# Altium PCB CurrentSensor.PcbDoc
Units mm, origin at the board's own origin, x right, y up, seen from the top; angles counter-clockwise.
Board outline 60 x 60 mm, 2 copper layers (Top Layer, Bottom Layer); 77 components, 38 nets, 222 pads, 436 vias.
Unrouted connection lines stored in the file: 1.
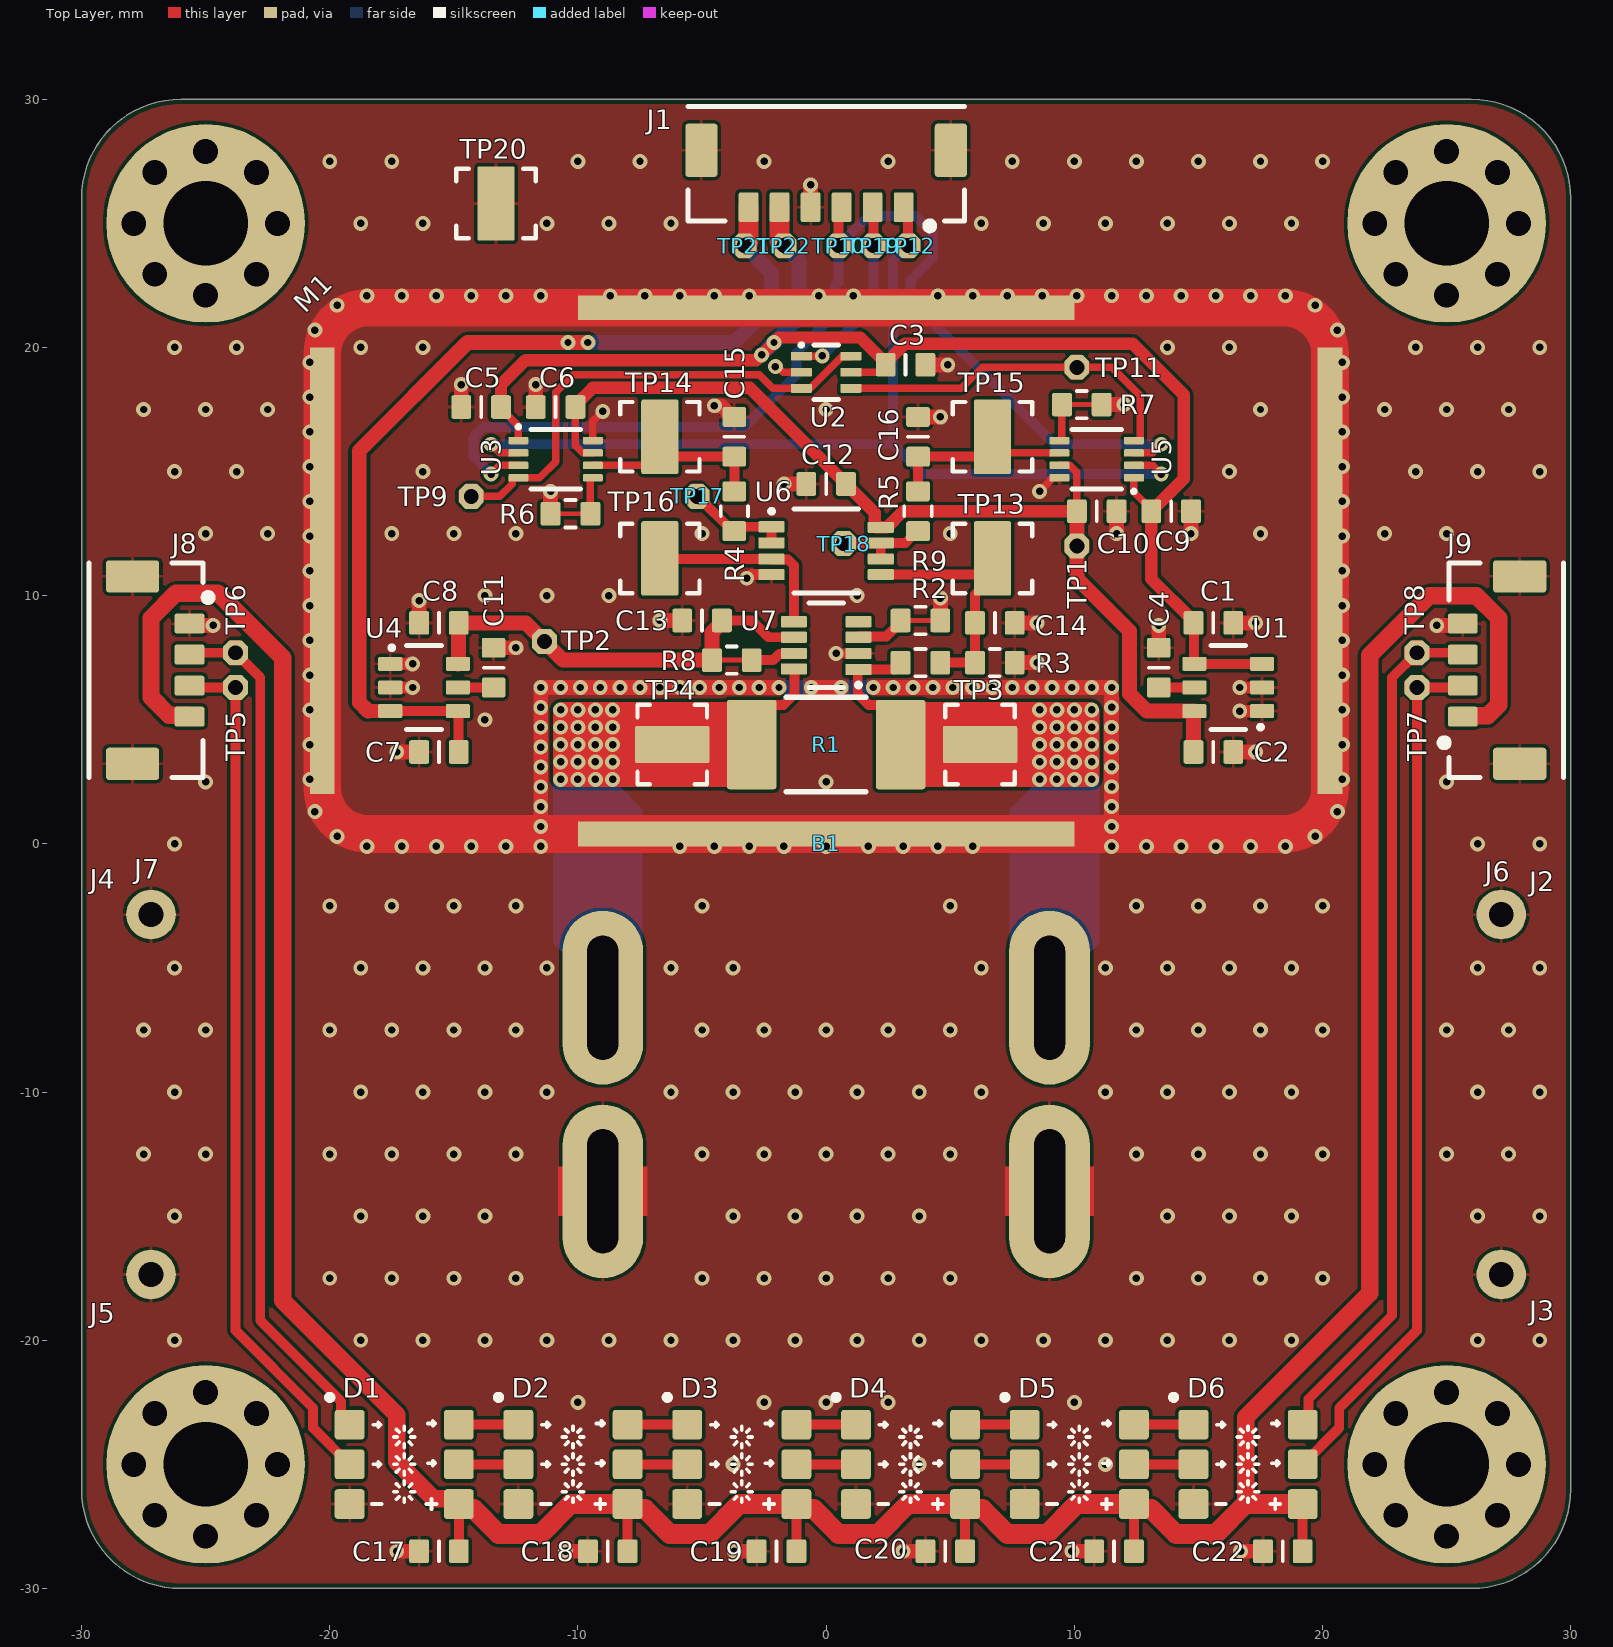
[diagram p0: Top Layer view]
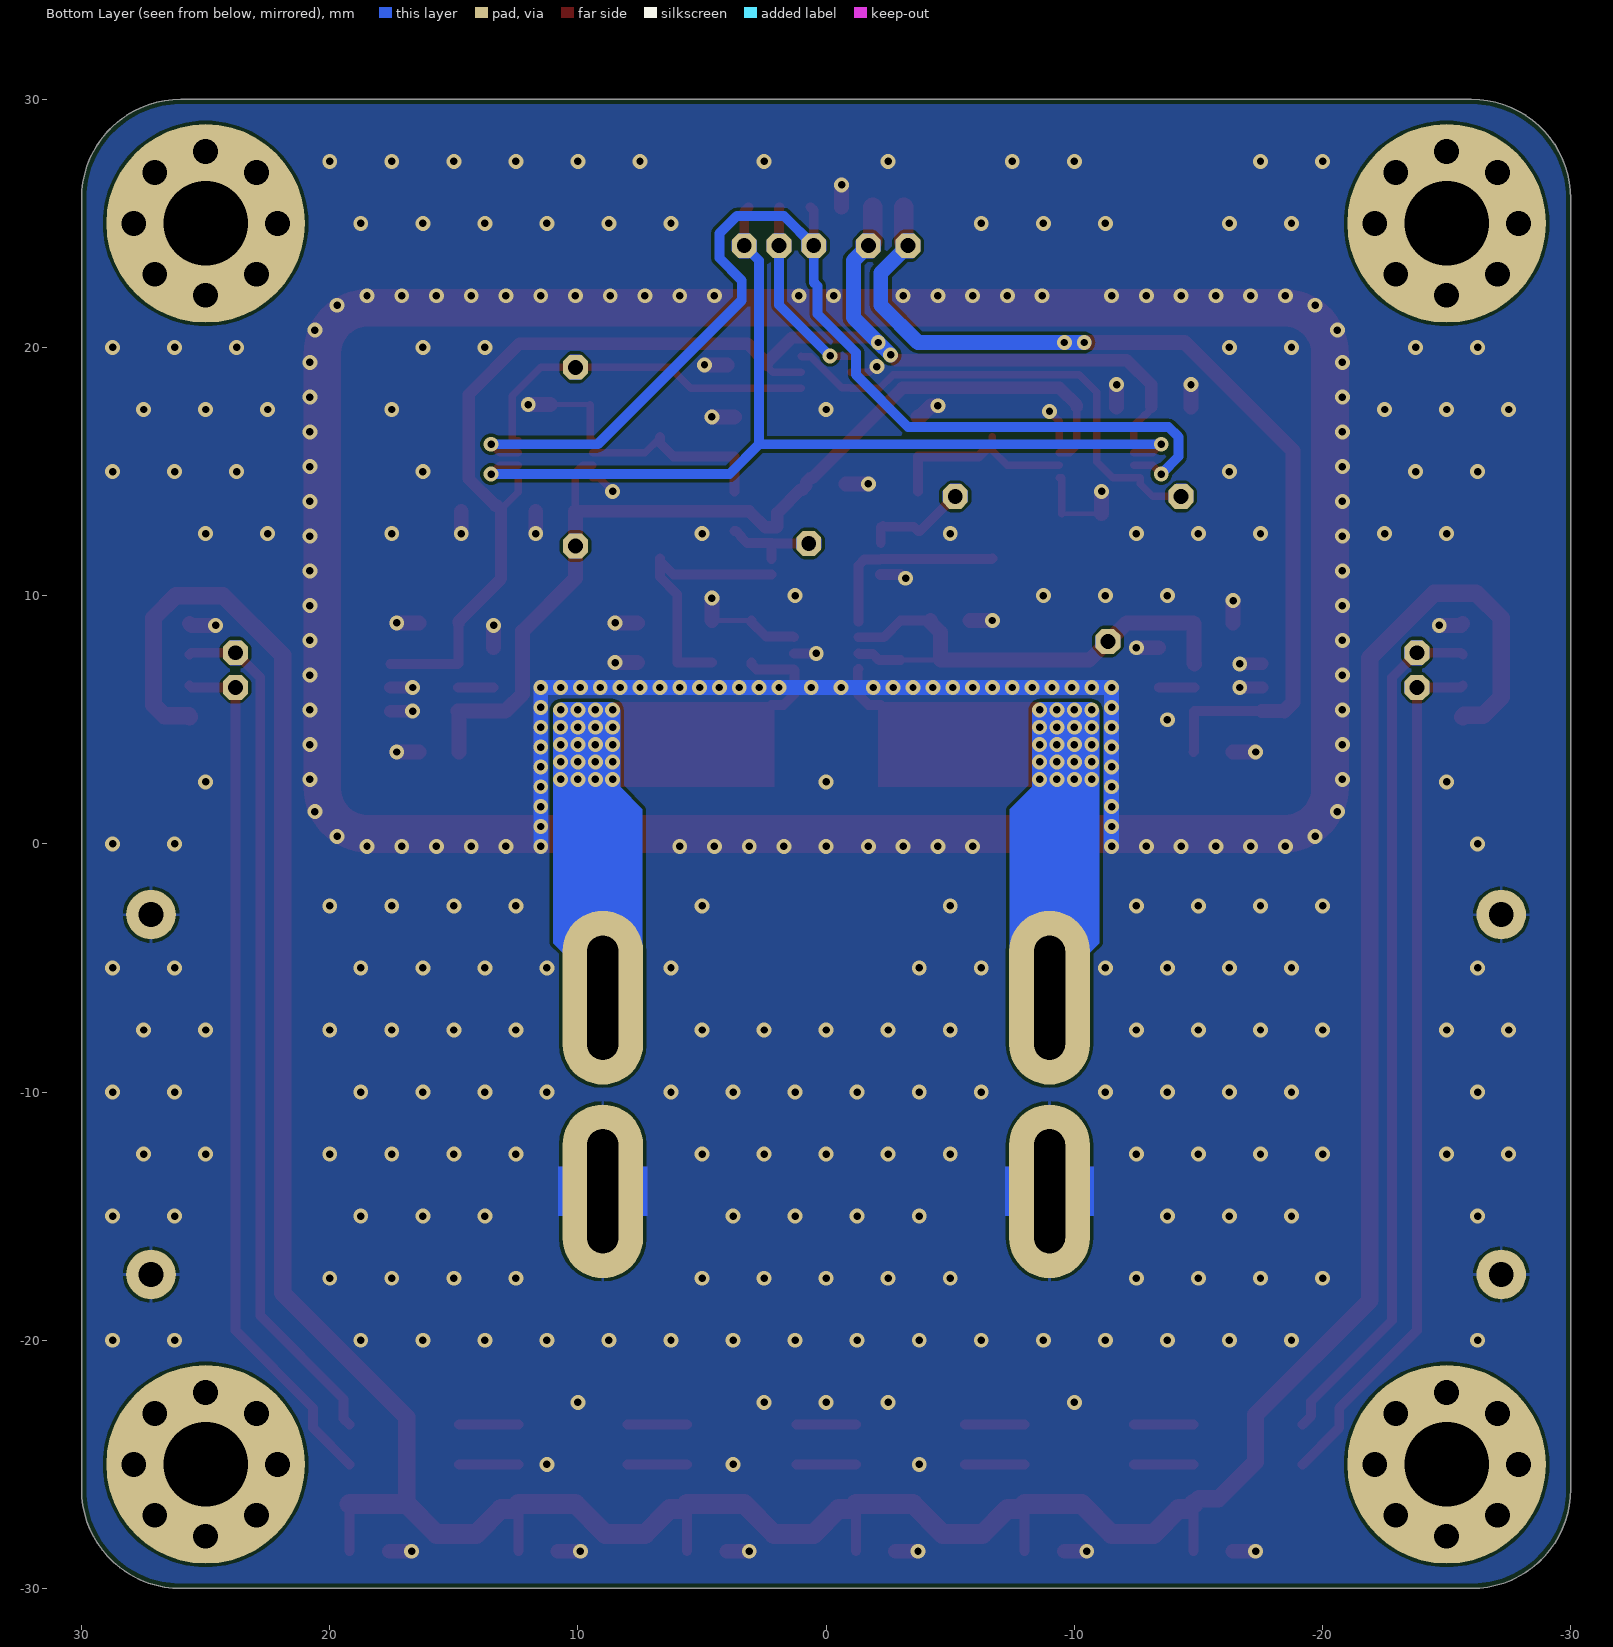
[diagram p1: Bottom Layer view, seen from below]
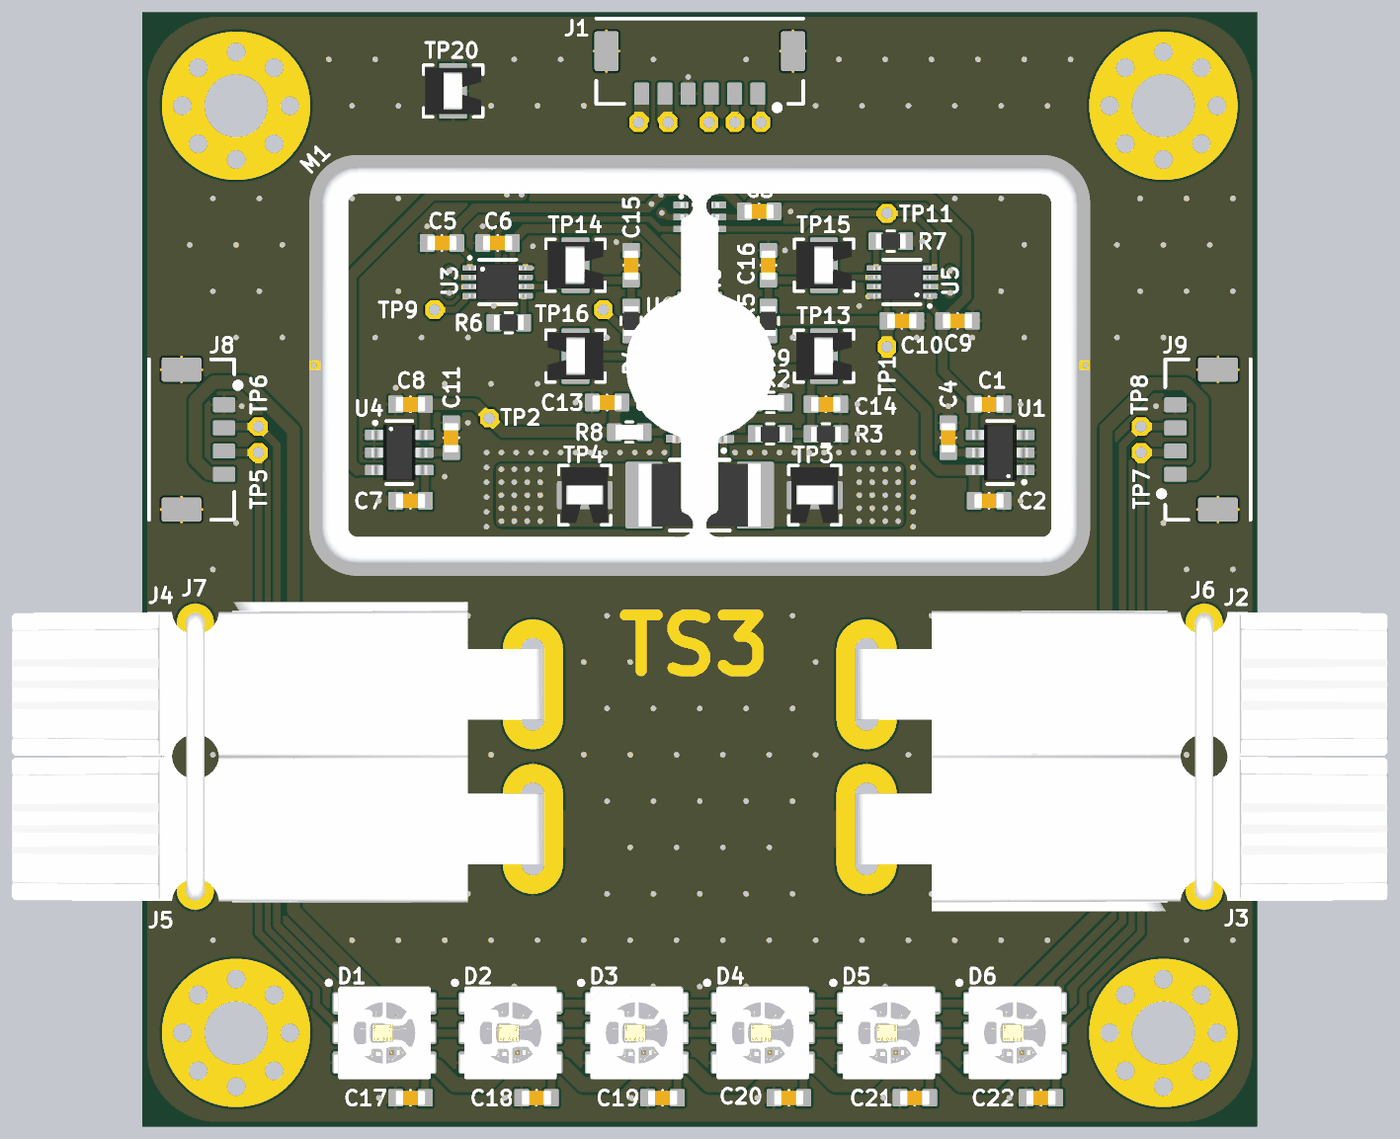
[diagram p2: 3D render of the assembled board from above, using the file's embedded part models]

## Layer stack, top to bottom
Top Solder: solder mask 0.0102, Solder Resist, Dk 3.5
Top Layer: signal copper 0.0356
Dielectric 1: dielectric 0.32, FR-4, Dk 4.8
Bottom Layer: signal copper 0.0356
Bottom Solder: solder mask 0.0102, Solder Resist, Dk 3.5

## Board outline
-26,-30 cw(c-26,-26) -30,-26 -30,26 cw(c-26,26) -26,30 26,30 cw(c26,26) 30,26 30,-26 cw(c26,-26) 26,-30

## Design rules (kind name [scope] priority, off if disabled: settings)
BoardOutlineClearance [All] p1: gap=0.2 ignorepadtopadclearanceinfootprint=FALSE
Clearance [All] p1: gap=0.127 ignorepadtopadclearanceinfootprint=FALSE except(0.25: Arc-Hole Track-Hole SMDPad-Hole THPad-Hole Via-Hole Fill-Hole Poly-Hole Region-Hole Text-Hole)
ComponentClearance [NOT InComponent('B1') vs NOT InComponent('B1')] p1: gap=0.127 collisioncheckmode=3 verticalgap=0.127 showdistances=TRUE
DiffPairsRouting [All] p1: maxlimit=0.254 minlimit=0.127 mostfreqgap=0.127 toplayer_minwidth=0.127 toplayer_maxwidth=25.4 toplayer_prefwidth=0.127 bottomlayer_minwidth=0.127 bottomlayer_maxwidth=25.4 bottomlayer_prefwidth=0.127 maxuncoupledlength=12.7
DiffPairsRouting DiffPairsRouting_USB [InDifferentialPair('USBD')] p2: maxlimit=0.2 minlimit=0.2 mostfreqgap=0.2 toplayer_minwidth=0.766 toplayer_maxwidth=0.766 toplayer_prefwidth=0.766 bottomlayer_minwidth=0.766 bottomlayer_maxwidth=0.766 bottomlayer_prefwidth=0.766 impedanceprofiledriven=TRUE impedanceprofileid={7DB69605-737D-4C2B-A8A7-E868D9FD1BFF} maxuncoupledlength=12.7
Height [All] p1: minheight=0 maxheight=1816.048 prefheight=12.7
HoleSize [All] p1: absolutevalues=TRUE maxlimit=6.3 minlimit=0.3 maxpercent=80.000 minpercent=20.000
HoleToHoleClearance [All] p1: gap=0.25 allowstackedmicrovias=FALSE
MinimumAnnularRing [All] p1: minimumring=0.15
MinimumSolderMaskSliver [All] p1: minsoldermaskwidth=0
PlaneClearance [All] p1: clearance=0.127
PlaneConnect PlaneConnectPowerPads [InPadClass('PowerPads')] p1: planeconnectstyle=Direct reliefexpansion=0.508 reliefentries=4 reliefconductorwidth=0.254 reliefairgap=0.254
PlaneConnect [All] p2: pad.planeconnectstyle=Relief pad.reliefexpansion=0.3 pad.reliefentries=4 pad.reliefconductorwidth=0.127 pad.reliefairgap=0.127 via.planeconnectstyle=Direct via.reliefexpansion=0.3 via.reliefentries=4 via.reliefconductorwidth=0.127 via.reliefairgap=0.127
PolygonConnect PolygonConnectPowerPads [All vs (InPadClass('PowerPads'))] p1: connectstyle=Direct reliefconductorwidth=0.254 reliefentries=4 polygonreliefangle="90 Angle" airgapwidth=0.254
PolygonConnect [All] p2: thpad.connectstyle=Relief thpad.reliefconductorwidth=0.127 thpad.reliefentries=4 thpad.polygonreliefangle="90 Angle" thpad.airgapwidth=0.127 smdpad.connectstyle=Relief smdpad.reliefconductorwidth=0.127 smdpad.reliefentries=4 smdpad.polygonreliefangle="90 Angle" smdpad.airgapwidth=0.127 via.connectstyle=Direct via.reliefconductorwidth=0.127 via.reliefentries=4 via.polygonreliefangle="90 Angle" via.airgapwidth=0.127
RoutingVias [All] p1: holewidth=0.3 width=0.5 viastyle="Through Hole" minholewidth=0.3 minwidth=0.5 maxholewidth=0.6 maxwidth=6.6
SilkToSilkClearance [All] p1: silktosilkclearance=0
SilkToSolderMaskClearance [IsPad] p1: minsilkscreentomaskgap=0.127 clearancetoexposedcopper=TRUE
SolderMaskExpansion SolderMaskExpansion_Via [IsVia] p1: expansion=0.075 istentingtop=TRUE
SolderMaskExpansion [NOT IsVia] p2: expansion=0.075 istentingtop=FALSE
Width [All] p1: maxlimit=25.4 minlimit=0.127 preferedwidth=0.127 minimp=50.000000 maximp=50.000000 favimp=50.000000
20 further rules are at their usual default settings.

## Components (designator, comment, footprint, x,y, rotation, side; value= is the part's Value field where it differs from the comment)
B1 "Board Outline Square" PCB_OUTLINE_SQUARE 0,0 r0 top locked
C1 "Capacitor - Ceramic - Generic" CAPACITOR_0603(1608)_GENERIC 15.6,8.9 r0 top value=100nF
C2 "Capacitor - Ceramic - Generic" CAPACITOR_0603(1608)_GENERIC 15.6,3.7 r180 top value=1uF
C3 "Capacitor - Ceramic - Generic" CAPACITOR_0603(1608)_GENERIC 3.2,19.3 r0 top value=100nF
C4 "Capacitor - Ceramic - Generic" CAPACITOR_0603(1608)_GENERIC 13.4,7.1 r270 top value=1uF
C5 "Capacitor - Ceramic - Generic" CAPACITOR_0603(1608)_GENERIC -13.9,17.6 r0 top value=1uF
C6 "Capacitor - Ceramic - Generic" CAPACITOR_0603(1608)_GENERIC -10.9,17.6 r0 top value=1uF
C7 "Capacitor - Ceramic - Generic" CAPACITOR_0603(1608)_GENERIC -15.6,3.7 r180 top value=100nF
C8 "Capacitor - Ceramic - Generic" CAPACITOR_0603(1608)_GENERIC -15.6,8.9 r0 top value=1uF
C9 "Capacitor - Ceramic - Generic" CAPACITOR_0603(1608)_GENERIC 13.9,13.4 r180 top value=1uF
C10 "Capacitor - Ceramic - Generic" CAPACITOR_0603(1608)_GENERIC 10.9,13.4 r180 top value=1uF
C11 "Capacitor - Ceramic - Generic" CAPACITOR_0603(1608)_GENERIC -13.4,7.1 r270 top value=1uF
C12 "Capacitor - Ceramic - Generic" CAPACITOR_0603(1608)_GENERIC 0,14.5 r180 top value=100nF
C13 "Capacitor - Ceramic - Generic" CAPACITOR_0603(1608)_GENERIC -5,9 r180 top value=100nF
C14 "Capacitor - Ceramic - Generic" CAPACITOR_0603(1608)_GENERIC 6.8,8.9 r0 top value=39nF
C15 "Capacitor - Ceramic - Generic" CAPACITOR_0603(1608)_GENERIC -3.7,16.4 r90 top value=10nF
C16 "Capacitor - Ceramic - Generic" CAPACITOR_0603(1608)_GENERIC 3.7,16.4 r90 top value=10nF
C17 "Capacitor - Ceramic - Generic" CAPACITOR_0603(1608)_GENERIC -15.6,-28.5 r180 top value=100nF
C18 "Capacitor - Ceramic - Generic" CAPACITOR_0603(1608)_GENERIC -8.8,-28.5 r180 top value=100nF
C19 "Capacitor - Ceramic - Generic" CAPACITOR_0603(1608)_GENERIC -2,-28.5 r180 top value=100nF
C20 "Capacitor - Ceramic - Generic" CAPACITOR_0603(1608)_GENERIC 4.8,-28.5 r180 top value=100nF
C21 "Capacitor - Ceramic - Generic" CAPACITOR_0603(1608)_GENERIC 11.6,-28.5 r180 top value=100nF
C22 "Capacitor - Ceramic - Generic" CAPACITOR_0603(1608)_GENERIC 18.4,-28.5 r180 top value=100nF
D1 "APA102C" 5X5MM(6PIN)_JLEAD_GENERIC -17,-25 r0 top
D2 "APA102C" 5X5MM(6PIN)_JLEAD_GENERIC -10.2,-25 r0 top
D3 "APA102C" 5X5MM(6PIN)_JLEAD_GENERIC -3.4,-25 r0 top
D4 "APA102C" 5X5MM(6PIN)_JLEAD_GENERIC 3.4,-25 r0 top
D5 "APA102C" 5X5MM(6PIN)_JLEAD_GENERIC 10.2,-25 r0 top
D6 "APA102C" 5X5MM(6PIN)_JLEAD_GENERIC 17,-25 r0 top
J1 "Connector - Header - 6P 2M - Generic" CONNECTOR_HEADER_MOLEX_5055670681 0,27.4 r0 top
J2 "PP45" CONNECTOR_BTOC_PP45_ANDERSON 9,-6.2 r90 top
J3 "PP45" CONNECTOR_BTOC_PP45_ANDERSON 9,-14 r90 top
J4 "PP45" CONNECTOR_BTOC_PP45_ANDERSON -9,-6.2 r270 top
J5 "PP45" CONNECTOR_BTOC_PP45_ANDERSON -9,-14 r270 top
J6 "PP45 Staple" CONNECTOR_ACCESSORY_PP45-STAPLE_ANDERSON 27.2,-10.1 r90 top
J7 "PP45 Staple" CONNECTOR_ACCESSORY_PP45-STAPLE_ANDERSON -27.2,-10.1 r270 top
J8 "Connector - Header - 4P 2M - Generic" CONNECTOR_HEADER_MOLEX_5055670481 -27.4,7 r90 top
J9 "Connector - Header - 4P 2M - Generic" CONNECTOR_HEADER_MOLEX_5055670481 27.4,7 r270 top
M1 "3670409" RFSHIELD_WURTH_3670409 0,11 r0 top locked
R1 "Resistor - Fixed - Generic" RESISTOR_2512(6432)_GENERIC 0,4 r0 top locked value=6mR
R2 "Resistor - Fixed - Generic" RESISTOR_0603(1608)_GENERIC 3.8,7.3 r0 top value=120kR
R3 "Resistor - Fixed - Generic" RESISTOR_0603(1608)_GENERIC 6.8,7.3 r0 top value=10kR
R4 "Resistor - Fixed - Generic" RESISTOR_0603(1608)_GENERIC -3.7,13.4 r90 top value=10R
R5 "Resistor - Fixed - Generic" RESISTOR_0603(1608)_GENERIC 3.7,13.4 r90 top value=10R
R6 "Resistor - Fixed - Jumper" RESISTOR_0603(1608)_NC_JUMPER -10.3,13.3 r0 top net-tie value=0R
R7 "Resistor - Fixed - Jumper" RESISTOR_0603(1608)_NC_JUMPER 10.3,17.7 r180 top net-tie value=0R
R8 "Resistor - Fixed - Jumper" RESISTOR_0603(1608)_NC_JUMPER -3.8,7.4 r0 top net-tie value=0R
R9 "Resistor - Fixed - Jumper" RESISTOR_0603(1608)_NC_JUMPER 3.8,9 r180 top net-tie value=0R
TP1 "Test Point - THT" TESTPOINT_THT_OCTAGON 10.1,12 r90 top
TP2 "Test Point - THT" TESTPOINT_THT_OCTAGON -11.35,8.15 r90 top
TP3 "519XTR" TESTPOINT_LOOP_SMD_KEYSTONE_519X 6.2,4 r0 top
TP4 "519XTR" TESTPOINT_LOOP_SMD_KEYSTONE_519X -6.2,4 r0 top
TP5 "Test Point - THT" TESTPOINT_THT_OCTAGON -23.8,6.3 r90 top
TP6 "Test Point - THT" TESTPOINT_THT_OCTAGON -23.8,7.7 r90 top
TP7 "Test Point - THT" TESTPOINT_THT_OCTAGON 23.8,6.3 r90 top
TP8 "Test Point - THT" TESTPOINT_THT_OCTAGON 23.8,7.7 r90 top
TP9 "Test Point - THT" TESTPOINT_THT_OCTAGON -14.3,14 r90 top
TP10 "Test Point - THT" TESTPOINT_THT_OCTAGON 0.5,24.1 r90 top
TP11 "Test Point - THT" TESTPOINT_THT_OCTAGON 10.1,19.2 r90 top
TP12 "Test Point - THT" TESTPOINT_THT_OCTAGON 3.3,24.1 r90 top
TP13 "519XTR" TESTPOINT_LOOP_SMD_KEYSTONE_519X 6.7,11.5 r90 top
TP14 "519XTR" TESTPOINT_LOOP_SMD_KEYSTONE_519X -6.7,16.4 r90 top
TP15 "519XTR" TESTPOINT_LOOP_SMD_KEYSTONE_519X 6.7,16.4 r90 top
TP16 "519XTR" TESTPOINT_LOOP_SMD_KEYSTONE_519X -6.7,11.5 r270 top
TP17 "Test Point - THT" TESTPOINT_THT_OCTAGON -5.2,14 r90 top
TP18 "Test Point - THT" TESTPOINT_THT_OCTAGON 0.7,12.1 r90 top
TP19 "Test Point - THT" TESTPOINT_THT_OCTAGON 1.9,24.1 r90 top
TP20 "519XTR" TESTPOINT_LOOP_SMD_KEYSTONE_519X -13.3,25.8 r90 top
TP21 "Test Point - THT" TESTPOINT_THT_OCTAGON -3.3,24.1 r90 top
TP22 "Test Point - THT" TESTPOINT_THT_OCTAGON -1.7,24.1 r90 top
U1 "REF35205QDBV" SOT23-6(DBV0006A)_TI 16.2,6.3 r180 top
U2 "SN74AUP2G14" SC70-6(DCK0006A)_TI 0,19 r0 top
U3 "ADS7042ID" VSSOP-8(DCU0008A)_TI -10.9,15.5 r0 top
U4 "REF35409QDBV" SOT23-6(DBV0006A)_TI -16.2,6.3 r0 top
U5 "ADS7042ID" VSSOP-8(DCU0008A)_TI 10.9,15.5 r180 top
U6 "TLV9002QDGK" VSSOP-8(DGK0008A)_TI 0,11.8 r0 top
U7 "INA241A5" SOT23-8(DDF0008A)_TI 0,8 r180 top

## Footprints (in the part's own frame and the unit in brackets; to place one, negate y for a bottom-side part, rotate by r counter-clockwise, add the part's x,y. Pads: shape width x height; smd on the part's side, far side on the other; paste and mask are expansions set on the pad)
5X5MM(6PIN)_JLEAD_GENERIC [mm]
  rrect20% 1.2x1.2 smd: 1(-2.2,1.6) 2(-2.2,0) 3(-2.2,-1.6) 4(2.2,-1.6) 5(2.2,0) 6(2.2,1.6)
  silkscreen extent -3.1,-1.8 1.3,2.8, body extent -2.75,-2.5 2.75,2.5, height 1.55
CAPACITOR_0603(1608)_GENERIC [mm]
  rrect20% 0.8x0.95 smd: 1(-0.8,0) 2(0.8,0)
  silkscreen extent 0,-0.4 0,0.4, body extent -0.8,-0.4 0.8,0.4, height 0.9
CONNECTOR_ACCESSORY_PP45-STAPLE_ANDERSON [mm]
  round 2 hole 1: 1(-7.25,0) 1(7.25,0)
  oval 7x3.25 on Mech16: ""(-4,18.2) ""(3.9,18.2)
  body extent -7.75,-0.5 7.75,0.5, height 9.4
CONNECTOR_BTOC_PP45_ANDERSON [mm]
  oval 7x3.25 hole 1.25 slot 5 at 0 deg: 1(0,0)
  oval 7x3.25 on Mech16: ""(-7.9,0) ""(0,7.92) ""(7.9,0)
  body extent -4.45,-28.1 3.96,0.52, height 8.39
CONNECTOR_HEADER_MOLEX_5055670481 [mm]
  rrect20% 0.8x1.2 smd: 1(1.875,-1.75) 2(0.625,-1.75) 3(-0.625,-1.75) 4(-1.875,-1.75)
  rrect20% 1.3x2.15 smd mask+0.076: M1(3.775,0.545) M2(-3.775,0.545)
  silkscreen extent -4.33,-2.65 4.33,2.3
CONNECTOR_HEADER_MOLEX_5055670681 [mm]
  rrect20% 0.8x1.2 smd: 1(3.125,-1.75) 2(1.875,-1.75) 3(0.625,-1.75) 4(-0.625,-1.75) 5(-1.875,-1.75) 6(-3.125,-1.75)
  rrect20% 1.3x2.15 smd mask+0.076: M1(5.025,0.545) M2(-5.025,0.545)
  silkscreen extent -5.58,-2.65 5.58,2.3
PCB_OUTLINE_SQUARE [mm]
  round 8 hole 3.4: 1(-25,-25) 1(-25,25) 1(25,-25) 1(25,25)
RESISTOR_0603(1608)_GENERIC [mm]
  rrect20% 0.8x0.95 smd: 1(-0.8,0) 2(0.8,0)
  silkscreen extent -0.2,-0.55 0.2,0.55, body extent -0.8,-0.4 0.8,0.4, height 0.55
RESISTOR_0603(1608)_NC_JUMPER [mm]
  rrect20% 0.8x0.95 smd: 1(-0.8,0) 2(0.8,0)
  Top Layer lines w0.2: -0.8,0 0.8,0
  silkscreen extent -0.2,-0.55 0.2,0.55, body extent -0.8,-0.4 0.8,0.4, height 0.55
RESISTOR_2512(6432)_GENERIC [mm]
  rrect10% 2x3.6 smd: 1(-3,0) 2(3,0)
  silkscreen extent -1.6,-1.9 1.6,1.9, body extent -3.3,-1.7 3.3,1.7, height 0.9
RFSHIELD_WURTH_3670409 [mm]
  rect 20x1 smd paste-2539.97 mask-2222: 1(0,-10.6) 1(0,10.6)
  rect 1x18 smd paste-2539.97 mask-2222: 1(20.3,0) 22(-20.3,0)
  Top Layer region: -21.05,-1 -21.05,8.75 -20.852,9.745 -20.288,10.588 -19.445,11.152 -18.45,11.35 -18.45,11.35 18.45,11.35 19.445,11.152 20.288,10.588 20.852,9.745 21.05,8.75 21.05,8.75 21.05,-1 19.55,-1 19.55,8.75 19.466,9.171 19.228,9.528 18.871,9.766 18.45,9.85 18.45,9.85 -18.45,9.85 -18.871,9.766 -19.228,9.528 -19.466,9.171 -19.55,8.75 -19.55,8.75 -19.55,-1
  Top Layer region: -21.05,-0.25 -21.05,-8.75 -20.852,-9.745 -20.288,-10.588 -19.445,-11.152 -18.45,-11.35 -18.45,-11.35 18.45,-11.35 19.445,-11.152 20.288,-10.588 20.852,-9.745 21.05,-8.75 21.05,-8.75 21.05,-0.25 19.55,-0.25 19.55,-8.75 19.466,-9.171 19.228,-9.528 18.871,-9.766 18.45,-9.85 18.45,-9.85 18.45,-9.85 -18.45,-9.85 -18.45,-9.85 -18.871,-9.766 -19.228,-9.528 -19.466,-9.171 -19.55,-8.75 -19.55,-8.75 -19.55,-0.25
  body extent -20.45,-10.75 20.45,10.75, height 2.5
SC70-6(DCK0006A)_TI [mm]
  rrect20% 0.85x0.35 smd: 1(-1,0.65) 2(-1,0) 3(-1,-0.65) 4(1,-0.65) 5(1,0) 6(1,0.65)
  silkscreen extent -1.05,-1.1 0.5,1.15, body extent -1.05,-1 1.05,1, height 1
SOT23-6(DBV0006A)_TI [mm]
  rrect20% 0.972x0.558 smd: 1(-1.362,0.95) 2(-1.362,0) 3(-1.362,-0.95) 4(1.362,-0.95) 5(1.362,0) 6(1.362,0.95)
  silkscreen extent -1.35,-1.7 0.7,1.7, body extent -1.5,-1.52 1.5,1.52, height 1.45
SOT23-8(DDF0008A)_TI [mm]
  rrect20% 1.05x0.45 smd mask+0.025: 1(-1.3,0.975) 2(-1.3,0.325) 3(-1.3,-0.325) 4(-1.3,-0.95) 5(1.3,-0.95) 6(1.3,-0.325) 7(1.3,0.325) 8(1.3,0.95)
  silkscreen extent -1.35,-1.7 0.7,1.7, body extent -1.47,-1.47 1.47,1.47, height 1.09
TESTPOINT_LOOP_SMD_KEYSTONE_519X [mm]
  rrect10% 3x1.5 smd: 1(0,0)
  silkscreen extent -1.4,-1.6 1.4,1.6, body extent -1.25,-1.5 1.25,1.5, height 2.49
TESTPOINT_THT_OCTAGON [mm]
  oct 1x1 hole 0.6: 1(0,0)
  Top Layer region: -0.2,-0.5 -0.5,-0.2 -0.5,0.2 -0.2,0.5 0.2,0.5 0.5,0.2 0.5,-0.2 0.2,-0.5
  Bottom Layer region: -0.2,-0.5 -0.5,-0.2 -0.5,0.2 -0.2,0.5 0.2,0.5 0.5,0.2 0.5,-0.2 0.2,-0.5
VSSOP-8(DCU0008A)_TI [mm]
  rrect30% 0.8x0.3 smd mask+0.05: 1(-1.5,0.75) 2(-1.5,0.25) 3(-1.5,-0.25) 4(-1.5,-0.75) 5(1.5,-0.75) 6(1.5,-0.25) 7(1.5,0.25) 8(1.5,0.75)
  silkscreen extent -1.55,-1.2 1,1.35, body extent -1.55,-1 1.55,1, height 0.77
VSSOP-8(DGK0008A)_TI [mm]
  rrect20% 1.05x0.45 smd mask+0.035: 1(-2.2,0.975) 2(-2.2,0.325) 3(-2.2,-0.325) 4(-2.2,-0.95) 5(2.2,-0.95) 6(2.2,-0.325) 7(2.2,0.325) 8(2.2,0.95)
  silkscreen extent -2.25,-1.7 1.3,1.7, body extent -2.45,-1.5 2.45,1.5, height 1.1

## Part data
B1: library part Board_Outline_Square
C1 C3 C7 C12 C13 C17 C18 C19 C20 C21 C22: library part CAP-CER_100NF_100V_20%_X7R_0603(1608), "100nF ±20% 100V Ceramic Capacitor X7R 0603(1608 Metric)", Manufacturer 1="Murata Electronics", Manufacturer Lifecycle 1=Active, Manufacturer Part Number 1=GRM188R72A104KA35D, Manufacturer Part Number 2=GRM188R72A104KA35J, Manufacturer Part Number 3=GRM188R72A104MA35D, Package/Case Imperial=0603, Package/Case Metric=1608, Temperature Coefficient=X7R, Tolerance=20%, Voltage - Rated=100V, Full Item="Ceramic Capacitor", Item=CAP-CER, Manufacturer 2="Murata Electronics", Manufacturer 3="Murata Electronics", Manufacturer Lifecycle 2=Active, Manufacturer Lifecycle 3=Active, Mounting Type=SMT, Name=CAP-CER_100NF_100V_20%_X7R_0603(1608)
C2 C4 C5 C6 C8 C9 C10 C11: library part CAP-CER_1UF_25V_20%_X7R_0603(1608), "1uF ±20% 25V Ceramic Capacitor X7R 0603(1608 Metric)", Manufacturer 1="Murata Electronics", Manufacturer Lifecycle 1=Active, Manufacturer Part Number 1=GCM188R71E105KA64D, Manufacturer Part Number 2=GCM188R71E105KA64J, Manufacturer Part Number 3=GCM188R71E105MA64D, Package/Case Imperial=0603, Package/Case Metric=1608, Temperature Coefficient=X7R, Tolerance=20%, Voltage - Rated=25V, Full Item="Ceramic Capacitor", Item=CAP-CER, Manufacturer 2="Murata Electronics", Manufacturer 3="Murata Electronics", Manufacturer Lifecycle 2=Active, Manufacturer Lifecycle 3=Active, Mounting Type=SMT, Name=CAP-CER_1UF_25V_20%_X7R_0603(1608)
C14: library part CAP-CER_39NF_50V_10%_X8L_0603(1608), "39nF ±10% 50V Ceramic Capacitor X8L 0603(1608 Metric)", Manufacturer 1="Murata Electronics", Manufacturer Lifecycle 1=Active, Manufacturer Part Number 1=GCM188L81H393KA55D, Package/Case Imperial=0603, Package/Case Metric=1608, Temperature Coefficient=X8L, Tolerance=10%, Voltage - Rated=50V, Full Item="Ceramic Capacitor", Item=CAP-CER, Mounting Type=SMT, Name=CAP-CER_39NF_50V_10%_X8L_0603(1608)
C15 C16: library part CAP-CER_10NF_100V_10%_X7R_0603(1608), "10nF ±10% 100V Ceramic Capacitor X7R 0603(1608 Metric)", Manufacturer 1="Murata Electronics", Manufacturer Lifecycle 1=Active, Manufacturer Part Number 1=GRM188R72A103KA01D, Manufacturer Part Number 2=GCM188R72A103KA37D, Manufacturer Part Number 3=GCJ188R72A103KA01D, Package/Case Imperial=0603, Package/Case Metric=1608, Temperature Coefficient=X7R, Tolerance=10%, Voltage - Rated=100V, Full Item="Ceramic Capacitor", Item=CAP-CER, Manufacturer 2="Murata Electronics", Manufacturer 3="Murata Electronics", Manufacturer Lifecycle 2=Active, Manufacturer Lifecycle 3=Active, Mounting Type=SMT, Name=CAP-CER_10NF_100V_10%_X7R_0603(1608)
D1 D2 D3 D4 D5 D6: library part "Diode - LED - Addressable - 5x5mm APA102C", Supplier Part Number 1=1568-COM-16345-ND, Supplier 1=Digi-Key, Supplier 2=Mouser, Supplier Part Number 2=474-COM-16345
J1: library part CON_HDR_6P_1.25MM-PITCH_50V_2.4A_SMT_MOLEX_5055670681, "Connector Header 6 Pin 1.25mm Pitch Mating 50V 2.4A Rated 8 Walls Shrouded SMT Molex 5055670681", Current - Max=2.4A, Manufacturer 1=Molex, Manufacturer Lifecycle 1=Active, Manufacturer Part Number 1=5055670681, Voltage - Max=50V, Fastening Type="Locking Ramp", Full Item="Connector Header", Item=CON_HDR, Mounting Type=SMT, Name=CON_HDR_6P_1.25MM-PITCH_50V_2.4A_SMT_MOLEX_5055670681, Number of Positions=6, Pitch - Mating=1.25mm, Shrouding="8 Walls"
J2 J3 J4 J5: library part "Connector - Modular - 1P - Anderson PP45"
J6 J7: library part "Connector - Accessory - Mechanical Support - Anderson PP45 Staple"
J8 J9: library part CON_HDR_4P_1.25MM-PITCH_50V_2.4A_SMT_MOLEX_5055670481, "Connector Header 4 Pin 1.25mm Pitch Mating 50V 2.4A Rated 6 Walls Shrouded SMT Molex 5055670481", Current - Max=2.4A, Manufacturer 1=Molex, Manufacturer Lifecycle 1=Active, Manufacturer Part Number 1=5055670481, Voltage - Max=50V, Fastening Type="Locking Ramp", Full Item="Connector Header", Item=CON_HDR, Mounting Type=SMT, Name=CON_HDR_4P_1.25MM-PITCH_50V_2.4A_SMT_MOLEX_5055670481, Number of Positions=4, Pitch - Mating=1.25mm, Shrouding="6 Walls"
M1: library part "RF-Shield - Cage - Wurth 3670409", Supplier Part Number 1=732-3670409-ND, Supplier 1=Digi-Key, Supplier 2=Mouser, Supplier Part Number 2=710-3670409
R1: library part RES-FXD_6MR_1%_2W_50PPM/°C_2512(6432), "6mR ±1% 2W Chip Resistor 50ppm/°C 2512(6432 Metric)", Manufacturer 1="Bourns Inc.", Manufacturer Lifecycle 1=Active, Manufacturer Part Number 1=CRE2512-FZ-R006E-3, Manufacturer Part Number 2=CRF2512-FZ-R006ELF, Package/Case Imperial=2512, Package/Case Metric=6432, Power=2W, Temperature Coefficient=50ppm/°C, Tolerance=1%, Full Item="Chip Resistor", Item=RES-FXD, Manufacturer 2="Bourns Inc.", Manufacturer Lifecycle 2=Active, Mounting Type=SMT, Name=RES-FXD_6MR_1%_2W_50PPM/°C_2512(6432)
R2: library part RES-FXD_120KR_0.1%_100MW_25PPM/°C_0603(1608), "120kR ±0.1% 100mW Chip Resistor 25ppm/°C 0603(1608 Metric)", Manufacturer 1=Panasonic, Manufacturer Lifecycle 1=Active, Manufacturer Part Number 1=ERA-3AEB124V, Package/Case Imperial=0603, Package/Case Metric=1608, Power=100mW, Temperature Coefficient=25ppm/°C, Tolerance=0.1%, Full Item="Chip Resistor", Item=RES-FXD, Mounting Type=SMT, Name=RES-FXD_120KR_0.1%_100MW_25PPM/°C_0603(1608)
R3: library part RES-FXD_10KR_0.1%_100MW_15PPM/°C_0603(1608), "10kR ±0.1% 100mW Chip Resistor 15ppm/°C 0603(1608 Metric)", Manufacturer 1=Panasonic, Manufacturer Lifecycle 1=Active, Manufacturer Part Number 1=ERA-3ARB103V, Manufacturer Part Number 2=ERA-3APB103V, Package/Case Imperial=0603, Package/Case Metric=1608, Power=100mW, Temperature Coefficient=15ppm/°C, Tolerance=0.1%, Full Item="Chip Resistor", Item=RES-FXD, Manufacturer 2=Panasonic, Manufacturer Lifecycle 2=Active, Mounting Type=SMT, Name=RES-FXD_10KR_0.1%_100MW_15PPM/°C_0603(1608)
R4 R5: library part RES-FXD_10R_1%_100MW_100PPM/°C_0603(1608), "10R ±1% 100mW Chip Resistor 100ppm/°C 0603(1608 Metric)", Manufacturer 1="Bourns Inc.", Manufacturer Lifecycle 1=Active, Manufacturer Part Number 1=CR0603-FX-10R0ELF, Manufacturer Part Number 2=CR0603AFX-10R0EAS, Manufacturer Part Number 3=CMP0603AFX-10R0ELF, Package/Case Imperial=0603, Package/Case Metric=1608, Power=100mW, Temperature Coefficient=100ppm/°C, Tolerance=1%, Full Item="Chip Resistor", Item=RES-FXD, Manufacturer 2="Bourns Inc.", Manufacturer 3="Bourns Inc.", Manufacturer Lifecycle 2=Active, Manufacturer Lifecycle 3=Active, Mounting Type=SMT, Name=RES-FXD_10R_1%_100MW_100PPM/°C_0603(1608)
R6 R7 R8 R9: library part RES-JMP_0R_1%_100MW_100PPM/°C_0603(1608), "0R ±1% 100mW Chip Resistor with Jumper 100ppm/°C 0603(1608 Metric)", Package/Case Imperial=0603, Package/Case Metric=1608, Power=100mW, Temperature Coefficient=100ppm/°C, Tolerance=1%, Full Item="Chip Resistor with Jumper", Item=RES-JMP, Mounting Type=SMT, Name=RES-JMP_0R_1%_100MW_100PPM/°C_0603(1608)
TP3 TP4 TP13 TP14 TP15 TP16 TP20: library part "Test Point - SMT - Loop - Keystone 519X"
U1: library part "IC - Power Management - Voltage Reference - TI REF35205", Supplier Part Number 1=REF35205QDBVR, Supplier 1="Texas Instruments", Supplier 2=Digi-Key, Supplier 3=Digi-Key, Supplier 4=Mouser, Supplier Part Number 2=296-REF35205QDBVRCT-ND, Supplier Part Number 3=296-REF35205QDBVRDKR-ND, Supplier Part Number 4=595-REF35205QDBVR
U2: library part "IC - Logic - Inverter - TI SN74AUP2G14", Supplier Part Number 1=595-SN74AUP2G14DCKR, Supplier 1=Mouser, Supplier 2="Texas Instruments", Supplier 3=Digi-Key, Supplier 4=Digi-Key, Supplier Part Number 2=SN74AUP2G14DCKR, Supplier Part Number 3=296-27361-1-ND, Supplier Part Number 4=296-27361-6-ND
U3 U5: library part "IC - Data Acquisition - ADC - TI ADS7042ID", Supplier Part Number 1=595-ADS7042IDCUR, Supplier 1=Mouser, Supplier 2=Digi-Key, Supplier 3=Digi-Key, Supplier 4=Digi-Key, Supplier 5=Mouser, Supplier 6="Arrow Electronics", Supplier 7=Digi-Key, Supplier 8=Digi-Key, Supplier 9=Digi-Key, Supplier Part Number 2=296-38532-1-ND, Supplier Part Number 3=296-38532-6-ND, Supplier Part Number 4=296-38532-2-ND, Supplier Part Number 5=595-ADS7042IDCUT, Supplier Part Number 6=ADS7042IDCUT, Supplier Part Number 7=296-38551-1-ND, Supplier Part Number 8=296-38551-6-ND, Supplier Part Number 9=296-38551-2-ND
U4: library part "IC - Power Management - Voltage Reference - TI REF35409", Supplier Part Number 1=REF35409QDBVR, Supplier 1="Texas Instruments", Supplier 2=Digi-Key, Supplier 3=Digi-Key, Supplier 4=Mouser, Supplier Part Number 2=296-REF35409QDBVRCT-ND, Supplier Part Number 3=296-REF35409QDBVRDKR-ND, Supplier Part Number 4=595-REF35409QDBVR
U6: library part "IC - Amplifier - Op Amp - TI TLV9002QDGK", Supplier Part Number 1=595-TLV9002QDGKRQ1, Supplier 1=Mouser, Supplier 2="Texas Instruments", Supplier 3=Digi-Key, Supplier 4=Digi-Key, Supplier Part Number 2=TLV9002QDGKRQ1, Supplier Part Number 3=296-TLV9002QDGKRQ1CT-ND, Supplier Part Number 4=296-TLV9002QDGKRQ1DKR-ND
U7: library part "IC - Amplifier - Current Sense - TI INA241A5", Supplier Part Number 1=INA241A5IDDFR, Supplier 1="Texas Instruments", Supplier 2=Digi-Key, Supplier 3=Digi-Key, Supplier 4=Mouser, Supplier Part Number 2=296-INA241A5IDDFRDKR-ND, Supplier Part Number 3=296-INA241A5IDDFRCT-ND, Supplier Part Number 4=595-INA241A5IDDFR

## Via types
v1: diameter 0.6, hole 0.3, Top Layer to Bottom Layer, tented both sides, 404 vias
v2: diameter 1.4, hole 1, Top Layer to Bottom Layer, tented both sides, 32 vias

## Nets (pads, with @x,y where several pads share a name; then routed paths per layer and width w, separated by ;. In a path a pad name is that pad's centre, name@x,y a point inside that pad or via, vN(x,y) a via of type N, cw(c..) or ccw(c..) an arc to the next point about the centre after c; other vN are vias at no path point)
2V048: C2.2 C6.2 C10.2 C12.1 TP1.1 U1.6 U3.7 U5.7 U6.8 | length 41.1
  Top Layer w0.3: C6.2 -10.1,16.035 -9.815,15.75 U3.7 ; U5.7 9.815,15.25 10.1,14.965 C10.2
  Top Layer w0.5: C6.2 -10.1,17.675 -9.402,18.373 -3.073,18.373 0.575,14.725 0.65,14.725 0.8,14.575 0.8,14.425 0.95,14.275 1.025,14.275 1.965,13.335 1.965,12.775 1.99,12.75 2.45,12.75 3.1,13.4 C10.2
  Top Layer w0.6: C10.2 TP1.1 10.1,10.696 12.227,8.569 12.227,6.041 12.918,5.35 U1.6@14.821,5.35 ; C2.2 14.8,5.329 U1.6@14.821,5.35 ; U1.6 U1.6@14.821,5.35
3V3: C1.1 C3.1 C5.2 C9.2 J1.5 TP22.1 U1.3 U1.4 U2.5 U3.1 U5.1 | length 57.4
  Top Layer w0.3: C5.2 -13.1,17.525 -12.85,17.275 -12.825,17.275 -12.4,16.85 U3.1 ; U2.5 2.15,19 2.4,19.25 C3.1 ; U5.1 12.4,14.175 C9.2@13.1,13.475
  Top Layer w0.4: C1.1 14.819,8.881 14.819,7.269 U1.4 U1.3
  Top Layer w0.5: C5.2 -13.1,18.5 -12.11,19.49 -2.81,19.49 v1(-2.6,19.7) v1(-2.1,20.2) -1.9,20.4 1.375,20.4 C3.1@2.4,19.375 ; C3.1 C3.1@2.4,19.375 ; C1.1 14.8,8.975 13.1,10.675 C9.2 13.1,13.475 13.25,13.625 13.325,13.625 14.4,14.7 14.4,18.1 12.348,20.152 3.177,20.152 C3.1@2.4,19.375
  Top Layer w0.8: J1.5 -1.875,24.275 TP22.1
  Bottom Layer w0.6: v1(-2.6,19.7) v1(-2.1,20.2) -1.1,21.2 -1.1,23.5 TP22.1
4V096: C8.2 C13.1 R8.1 TP2.1 U4.6 U7.6 | length 17.4
  Top Layer w0.4: C13.1 -3,9 -2.325,8.325 U7.6
  Top Layer w0.6: U4.6 -14.819,7.269 -14.819,8.881 C8.2 -12.1,8.9 -10.6,7.4 R8.1 -4.6,8.525 -4.2,8.925 C13.1
5V: C7.1 C17.1 C18.1 C19.1 C20.1 C21.1 C22.1 D1.4 D2.4 D3.4 D4.4 D5.4 D6.4 J1.6 J8.4 J9.1 TP21.1 U4.3 U4.4 | length 188
  Top Layer w0.4: U4.3 U4.4 -14.819,5.331 -14.819,3.719 C7.1 ; C17.1 D1.4 ; C18.1 D2.4 ; C19.1 D3.4 ; C20.1 D4.4 ; C21.1 D5.4 ; C22.1 D6.4
  Top Layer w0.55: -18.46,5.35 U4.3
  Top Layer w0.6: -18.46,5.35 -18.811,5.702 -18.811,15.839 -14.45,20.2 v1(-10.4,20.2) v1(-9.6,20.2)
  Top Layer w0.7: J8.4 -25.7,5.175 -26.475,5.175 -27.2,5.9 -27.2,9.1 -26.2,10.1 -24.5,10.1 -21.9,7.5 -21.9,-18.4 -17.3,-23 -17.3,-24.9 -15.807,-26.393 -15.007,-26.393 D1.4 ; 16.9,-26.6 16.9,-23.1 21.9,-18.1 21.9,7.6 24.3,10 26.2,10 27.1,9.1 27.1,5.6 26.657,5.157 25.682,5.157 J9.1
  Top Layer w0.8: D1.4 -14.6,-26.8 -14.2,-26.8 -13.2,-27.8 -11.5,-27.8 -10.3,-26.6 D2.4 -7.8,-26.8 -7.3,-26.8 -6.3,-27.8 -4.7,-27.8 -3.5,-26.6 D3.4 -1,-26.8 -0.5,-26.8 0.5,-27.8 2.1,-27.8 3.3,-26.6 D4.4 5.8,-26.8 6.3,-26.8 7.3,-27.8 8.9,-27.8 10.1,-26.6 D5.4 12.6,-26.8 13.1,-26.8 14.1,-27.8 15.7,-27.8 16.9,-26.6 D6.4 ; TP21.1 -3.125,24.275 J1.6
  Bottom Layer w0.6: v1(-10.4,20.2) v1(-9.6,20.2) -3.7,20.2 -2.2,21.7 -2.2,23 TP21.1
CKI: D1.2 J8.3 TP5.1 | length 35.1
  Top Layer w0.4: J8.3 -25.575,6.3 TP5.1 -23.8,-19.6 -20.673,-22.727 -20.673,-23.527 D1.2
CKIO: D3.5 D4.2 | length 2.4
  Top Layer w0.4: D3.5 D4.2
CKO: D6.5 J9.2 TP7.1 | length 35.1
  Top Layer w0.4: D6.5 20.673,-23.527 20.673,-22.727 23.8,-19.6 TP7.1 25.575,6.3 J9.2
CS: TP11.1 U2.4 U5.4 | length 14.5
  Top Layer w0.3: U2.4 5.45,18.35 6.3,19.2 11.5,19.2 12.65,18.05 12.65,16.25 U5.4
FB1: R4.1 TP17.1 U6.1 U6.2 | length 4.3
  Top Layer w0.4: TP17.1 -5.175,14 -3.775,12.6 R4.1 -3.525,12.775 U6.1@-2.275,12.775 ; U6.1@-2.3,12.8 U6.1@-2.275,12.775 ; U6.2 U6.1 U6.1@-2.275,12.775
FB2: R5.1 TP18.1 U6.6 U6.7 | length 3.9
  Top Layer w0.4: TP18.1 2.175,12.1 U6.7 ; U6.6 U6.7 ; R5.1 3.625,12.6 3.425,12.4 3.425,12.359 3.191,12.125 U6.7
GND: C1.2 C2.1 C3.2 C4.1 C5.1 C6.1 C7.2 C8.1 C9.1 C10.1 C11.1 C12.2 C13.2 C14.2 C15.2 C16.2 C17.2 C18.2 C19.2 C20.2 C21.2 C22.2 D1.3 D2.3 D3.3 D4.3 D5.3 D6.3 J1.4 J1.M1 J1.M2 J3.1 J5.1 J6.1 J7.1 J8.1 J8.M1 J8.M2 J9.4 J9.M1 J9.M2 M1.1 M1.22 R3.2 R6.1 R7.1 R9.1 TP20.1 U1.1 U1.2 U2.2 U3.8 U4.1 U4.2 U5.8 U6.4 U7.2 | length 102.6
  Top Layer w0.3: U3.8 -9.4,17.027 v1(-9,17.427) ; v1(-2.045,19.227) -1.964,19.227 -1.738,19 U2.2 ; v1(8.6,14.2) 9.15,14.75 U5.8
  Top Layer w0.4: v1(0.4,7.675) U7.2
  Top Layer w0.45: v1(-3.2,10.7) -3.159,10.7 -3.009,10.85 U6.4
  Top Layer w0.5: U4.2 v1(-16.662,6.3) ; U4.1 v1(-16.662,7.25) ; v1(16.662,5.35) U1.1 ; v1(16.662,6.3) U1.2
  Top Layer w0.6: J8.1 -25.575,8.8 v1(-24.7,8.8) ; v1(-17.3,-28.5) C17.2 ; v1(-17.3,3.7) C7.2 ; C8.1 v1(-16.4,9.8) ; C5.1 v1(-14.7,18.5) ; C11.1 v1(-12.5,7.9) ; C6.1 v1(-11.7,18.5) ; v1@-11.5,0.9 v1(-11.5,1.5) v1(-11.5,2.3) v1(-11.5,3.1) v1(-11.5,3.9) v1(-11.5,4.7) v1(-11.5,5.5) v1(-11.5,6.3) v1(-1.9,6.3) ; R6.1 v1(-11.1,14.2) ; v1(-10.5,-28.5) C18.2 ; v1(-6.7,9) C13.2 ; v1(-4.5,17.65) -4.225,17.65 -3.775,17.2 C15.2 ; v1(-3.7,-28.5) C19.2 ; v1(-1.7,14.5) C12.2 ; J1.4 v1(-0.625,26.55) ; v1(-0.6,6.3) v1(0.6,6.3) ; v1(1.9,6.3) v1(2.7,6.3) v1(3.5,6.3) v1(4.3,6.3) v1(5.1,6.3) v1(5.9,6.3) v1(6.7,6.3) v1(7.5,6.3) v1(8.3,6.3) v1(9.1,6.3) v1(9.9,6.3) v1(10.7,6.3) v1(11.5,6.3) v1(11.5,5.5) v1(11.5,4.7) v1(11.5,3.9) v1(11.5,3.1) v1(11.5,2.3) v1(11.5,1.5) v1@11.5,0.8 ; v1(3.1,-28.5) C20.2 ; C16.2 v1(4.6,17.2) ; C3.2 v1(4.9,19.3) ; R9.1 v1(4.6,9.9) ; R3.2 v1(8.5,7.3) ; C14.2 v1(8.5,8.9) ; v1(9.9,-28.5) C21.2 ; R7.1 v1(12,17.7) ; v1(11.7,12.5) C10.1 ; C4.1 v1(13.4,8.8) ; v1(14.7,12.5) C9.1 ; C2.1 v1(17.3,3.7) ; C1.2 v1(17.3,8.9) ; v1(16.7,-28.5) C22.2 ; v1(24.6,8.8) 25.575,8.8 J9.4
  Bottom Layer w0.6: v1(-11.5,-0.1) v1(-11.5,0.7) v1(-11.5,1.5) v1(-11.5,2.3) v1(-11.5,3.1) v1(-11.5,3.9) v1(-11.5,4.7) v1(-11.5,5.5) v1(-11.5,6.3) v1(1.9,6.3) v1(2.7,6.3) v1(3.5,6.3) v1(4.3,6.3) v1(5.1,6.3) v1(5.9,6.3) v1(6.7,6.3) v1(7.5,6.3) v1(8.3,6.3) v1(9.1,6.3) v1(9.9,6.3) v1(10.7,6.3) v1(11.5,6.3) v1(11.5,5.5) v1(11.5,4.7) v1(11.5,3.9) v1(11.5,3.1) v1(11.5,2.3) v1(11.5,1.5) v1(11.5,0.7) v1(11.5,-0.1)
  other v1: -3.75,-25 3.75,-25 11.25,-25 -10,-22.5 -2.5,-22.5 0,-22.5 2.5,-22.5 10,-22.5 -26.25,-20 -18.75,-20 -16.25,-20 -13.75,-20 -11.25,-20 -8.75,-20 -6.25,-20 -3.75,-20 -1.25,-20 1.25,-20 3.75,-20 6.25,-20 8.75,-20 11.25,-20 13.75,-20 16.25,-20 18.75,-20 26.25,-20 28.75,-20 -20,-17.5 -17.5,-17.5 -15,-17.5 -12.5,-17.5 -5,-17.5 -2.5,-17.5 0,-17.5 2.5,-17.5 5,-17.5 12.5,-17.5 15,-17.5 17.5,-17.5 20,-17.5 -26.25,-15 -18.75,-15 -16.25,-15 -13.75,-15 -3.75,-15 -1.25,-15 1.25,-15 3.75,-15 13.75,-15 16.25,-15 18.75,-15 26.25,-15 28.75,-15 -27.5,-12.5 -25,-12.5 -20,-12.5 -17.5,-12.5 -15,-12.5 -12.5,-12.5 -5,-12.5 -2.5,-12.5 0,-12.5 2.5,-12.5 5,-12.5 12.5,-12.5 15,-12.5 17.5,-12.5 20,-12.5 25,-12.5 27.5,-12.5 -26.25,-10 -18.75,-10 -16.25,-10 -13.75,-10 -11.25,-10 -6.25,-10 -3.75,-10 -1.25,-10 1.25,-10 3.75,-10 6.25,-10 11.25,-10 13.75,-10 16.25,-10 18.75,-10 26.25,-10 28.75,-10 -27.5,-7.5 -25,-7.5 -20,-7.5 -17.5,-7.5 -15,-7.5 -12.5,-7.5 -5,-7.5 -2.5,-7.5 0,-7.5 2.5,-7.5 5,-7.5 12.5,-7.5 15,-7.5 17.5,-7.5 20,-7.5 25,-7.5 27.5,-7.5 -26.25,-5 -18.75,-5 -16.25,-5 -13.75,-5 -11.25,-5 -6.25,-5 -3.75,-5 6.25,-5 11.25,-5 13.75,-5 16.25,-5 18.75,-5 26.25,-5 28.75,-5 -20,-2.5 -17.5,-2.5 -15,-2.5 -12.5,-2.5 -5,-2.5 5,-2.5 12.5,-2.5 15,-2.5 17.5,-2.5 20,-2.5 -18.5,-0.1 -17.1,-0.1 -15.7,-0.1 -14.3,-0.1 -12.9,-0.1 -5.9,-0.1 -4.5,-0.1 -3.1,-0.1 -1.7,-0.1 0,-0.1 1.7,-0.1 3.1,-0.1 4.5,-0.1 5.9,-0.1 12.9,-0.1 14.3,-0.1 15.7,-0.1 17.1,-0.1 18.5,-0.1 -26.25,0 26.25,0 28.75,0 -19.7,0.3 19.7,0.3 -20.6,1.3 20.6,1.3 -25,2.5 0,2.5 25,2.5 -20.8,2.6 20.8,2.6 -20.8,4 20.8,4 -13.75,5 -20.8,5.4 20.8,5.4 -10.7,6.3 -9.9,6.3 -9.1,6.3 -8.3,6.3 -7.5,6.3 -6.7,6.3 -5.9,6.3 -5.1,6.3 -4.3,6.3 -3.5,6.3 -2.7,6.3 -20.8,6.8 20.8,6.8 -20.8,8.2 20.8,8.2 -20.8,9.6 20.8,9.6 -13.75,10 -11.25,10 -8.75,10 1.25,10 -20.8,11 20.8,11 -20.8,12.4 20.8,12.4 -25,12.5 -22.5,12.5 -17.5,12.5 -15,12.5 -12.5,12.5 -5,12.5 5,12.5 17.5,12.5 22.5,12.5 25,12.5 -20.8,13.8 20.8,13.8 -26.25,15 -23.75,15 -16.25,15 16.25,15 23.75,15 26.25,15 28.75,15 -20.8,15.2 20.8,15.2 -20.8,16.6 20.8,16.6 -27.5,17.5 -25,17.5 -22.5,17.5 0,17.5 17.5,17.5 22.5,17.5 25,17.5 27.5,17.5 -20.8,18 20.8,18 -20.8,19.4 20.8,19.4 -26.25,20 -23.75,20 -18.75,20 -16.25,20 13.75,20 16.25,20 23.75,20 26.25,20 28.75,20 -20.6,20.7 20.6,20.7 -19.7,21.7 19.7,21.7 -18.5,22.083 -17.1,22.083 -15.7,22.083 -14.3,22.083 -12.9,22.083 -11.5,22.083 -8.7,22.083 -7.3,22.083 -5.9,22.083 -4.5,22.083 -3.1,22.083 -0.3,22.083 1.1,22.083 4.5,22.083 5.9,22.083 7.3,22.083 8.7,22.083 10.1,22.083 11.5,22.083 12.9,22.083 14.3,22.083 15.7,22.083 17.1,22.083 18.5,22.083 -18.75,25 -16.25,25 -11.25,25 -8.75,25 -6.25,25 6.25,25 8.75,25 11.25,25 13.75,25 16.25,25 18.75,25 -20,27.5 -17.5,27.5 -10,27.5 -7.5,27.5 -2.5,27.5 2.5,27.5 7.5,27.5 10,27.5 12.5,27.5 15,27.5 17.5,27.5 20,27.5
IOUT: TP16.1 U6.3 U7.5 | length 7.8
  Top Layer w0.4: TP16.1 -6.675,11.475 U6.3 -2.175,11.45 -1.534,11.45 -1.3,11.216 U7.5
NetC4_2: C4.2 U1.5 | length 1.4
  Top Layer w0.4: C4.2 U1.5
NetC11_2: C11.2 U4.5 | length 1.4
  Top Layer w0.4: U4.5 C11.2
NetD1_5: D1.5 D2.2 | length 2.4
  Top Layer w0.4: D1.5 D2.2
NetD1_6: D1.6 D2.1 | length 2.4
  Top Layer w0.4: D1.6 D2.1
NetD2_5: D2.5 D3.2 | length 2.4
  Top Layer w0.4: D2.5 D3.2
NetD2_6: D2.6 D3.1 | length 2.4
  Top Layer w0.4: D2.6 D3.1
NetD4_5: D4.5 D5.2 | length 2.4
  Top Layer w0.4: D4.5 D5.2
NetD4_6: D4.6 D5.1 | length 2.4
  Top Layer w0.4: D4.6 D5.1
NetD5_5: D5.5 D6.2 | length 2.4
  Top Layer w0.4: D5.5 D6.2
NetD5_6: D5.6 D6.1 | length 2.4
  Top Layer w0.4: D5.6 D6.1
NetR6_2: R6.2 U3.5 | length 1.5
  Top Layer w0.3: R6.2 -9.5,14.75 U3.5
NetR7_2: R7.2 U5.5 | length 1.5
  Top Layer w0.3: U5.5 9.5,16.25 R7.2
NetR8_2: R8.2 U7.7 | length 1.8
  Top Layer w0.4: R8.2 -2.136,7.4 -1.886,7.65 -1.325,7.65 U7.7
NetR9_2: R9.2 U7.3 | length 2
  Top Layer w0.4: U7.3 1.325,8.35 2.425,8.35 3,8.925 R9.2
OUT1: C15.1 R4.2 TP14.1 U3.6 | length 8.1
  Top Layer w0.3: U3.6 -7.3,15.25 -6.7,15.85 -6.7,16.15 TP14.1
  Top Layer w0.4: TP14.1@-6.7,16.15 -6.15,15.6 C15.1 R4.2
OUT2: C16.1 R5.2 TP15.1 U5.6 | length 7.8
  Top Layer w0.3: TP15.1@6.7,16.35 7.3,15.75 U5.6
  Top Layer w0.4: R5.2 C16.1 6.15,15.6 6.7,16.15 6.7,16.35 TP15.1
SDI: D1.1 J8.2 TP6.1 | length 34.9
  Top Layer w0.4: J8.2 -25.575,7.7 TP6.1 -22.8,6.7 -22.8,-19.2 -19.539,-22.461 -19.539,-23.061 D1.1
SDIO: D3.6 D4.1 | length 2.4
  Top Layer w0.4: D3.6 D4.1
SDO: D6.6 J9.3 TP8.1 | length 34.9
  Top Layer w0.4: D6.6 19.439,-23.161 19.439,-22.361 22.8,-19 22.8,6.7 TP8.1 25.575,7.7 J9.3
SPI.C\S\: J1.2 TP19.1 U2.1 | length 7.7
  Top Layer w0.3: U2.1 -0.996,19.654 -0.162,19.654 v1(-0.158,19.658)
  Top Layer w0.4: J1.2 1.9,25.625 TP19.1
  Bottom Layer w0.4: v1(-0.158,19.658) 1.9,21.716 TP19.1
SPI.CIPO: J1.3 TP10.1 U3.3 U5.3 | length 46
  Top Layer w0.3: v1(-13.5,14.9) -13.15,15.25 U3.3 ; U5.3 13.15,15.75 v1(13.5,16.1)
  Top Layer w0.4: TP10.1 0.5,25.525 J1.3
  Bottom Layer w0.4: v1(-13.5,14.9) -14.2,15.6 -14.2,16.4 -13.8,16.8 -3.3,16.8 -1.2,18.9 -1.2,19.8 0.35,21.35 0.35,22.475 0.5,22.625 TP10.1 1.7,25.3 3.6,25.3 4.3,24.6 4.3,23.6 3.4,22.7 3.4,21.9 9.2,16.1 v1(13.5,16.1)
SPI.SCLK: J1.1 TP12.1 U3.2 U5.2 | length 39.9
  Top Layer w0.3: v1(-13.5,16.1) -13.15,15.75 U3.2 ; U5.2 13.15,15.25 v1(13.5,14.9)
  Top Layer w0.4: J1.1 3.3,25.475 TP12.1
  Bottom Layer w0.4: v1(-13.5,16.1) 2.7,16.1 ; TP12.1 2.7,23.5 2.7,16.1 ; v1(13.5,14.9) 3.9,14.9 2.7,16.1
VIN: J4.1 R1.1 TP4.1 U7.8 | length 4.1
  Top Layer w0.4: R1.1 -3,4.8 -2.2,5.6 -1.713,5.6 -1.273,6.04 -1.273,7.025 -1.298,7.05 U7.8
  other v1: -10.7,2.6 -10,2.6 -9.3,2.6 -8.6,2.6 -10.7,3.3 -10,3.3 -9.3,3.3 -8.6,3.3 -10.7,4 -10,4 -9.3,4 -8.6,4 -10.7,4.7 -10,4.7 -9.3,4.7 -8.6,4.7 -10.7,5.4 -10,5.4 -9.3,5.4 -8.6,5.4
VOUT: J2.1 R1.2 R2.1 TP3.1 U7.1 | length 5.9
  Top Layer w0.4: R1.2 3,4.8 2.2,5.6 1.713,5.6 1.273,6.04 1.273,7 1.298,7.025 U7.1 2.8,7.025 3,7.225 R2.1
  other v1: 8.6,2.6 9.3,2.6 10,2.6 10.7,2.6 8.6,3.3 9.3,3.3 10,3.3 10.7,3.3 8.6,4 9.3,4 10,4 10.7,4 8.6,4.7 9.3,4.7 10,4.7 10.7,4.7 8.6,5.4 9.3,5.4 10,5.4 10.7,5.4
VSNS: C14.1 R2.2 R3.1 TP13.1 U6.5 | length 10.6
  Top Layer w0.4: U6.5 6.15,10.85 TP13.1@6.7,11.4 ; R2.2 R3.1 C14.1 6,10.05 6.7,10.75 TP13.1@6.7,11.4 ; TP13.1 TP13.1@6.7,11.4
~CS: TP9.1 U2.3 U2.6 U3.4 | length 19.9
  Top Layer w0.3: TP9.1 -13.15,14 -12.65,14.5 -12.65,14.75 U3.4 -11.55,14.75 -10.9,15.4 -10.9,18.2 -10.2,18.9 -2.7,18.9 -2.15,18.35 U2.3 -0.975,18.375 -0.625,18.375 0.625,19.625 0.975,19.625 U2.6
pads on no net: B1.1 J2. J3. J4. J5. J6. J7. U7.4
copper on no net:
  other v2: -25,-27.9 25,-27.9 -27.051,-27.051 -22.949,-27.051 22.949,-27.051 27.051,-27.051 -27.9,-25 -22.1,-25 22.1,-25 27.9,-25 -27.051,-22.949 -22.949,-22.949 22.949,-22.949 27.051,-22.949 -25,-22.1 25,-22.1 -25,22.1 25,22.1 -27.051,22.949 -22.949,22.949 22.949,22.949 27.051,22.949 -27.9,25 -22.1,25 22.1,25 27.9,25 -27.051,27.051 -22.949,27.051 22.949,27.051 27.051,27.051 -25,27.9 25,27.9

## Polygon pours and split planes (outlines as drawn)
GND on Bottom Layer "GND_L02_P000" (solid, pour order 0): -29.9,29.8 -29.9,-30.2 30.1,-30.2 30.1,29.8
GND on Top Layer "GND_L01_P001" (solid, pour order 1): -29.9,29.8 -29.9,-30.2 30.1,-30.2 30.1,29.8

## Other copper
Top Layer:
  rectangle net GND: 7.2,-15 10.8,-13
  rectangle net GND: -10.8,-15 -7.2,-13
  region net VOUT: 11,2.6 10.7,2.3 2.1,2.3 2.1,5.7 10.7,5.7 11,5.4
  region net VIN: -11,5.4 -10.7,5.7 -2.1,5.7 -2.1,2.3 -10.7,2.3 -11,2.6
Bottom Layer:
  rectangle net GND: 7.2,-15 10.8,-13
  rectangle net GND: -10.8,-15 -7.2,-13
  region net VOUT: 11,5.4 11,-4 10.6,-4.4 7.4,-4.4 7.4,1.4 8.3,2.3 8.3,5.4 8.6,5.7 10.7,5.7
  region net VIN: -11,5.4 -11,-4 -10.6,-4.4 -7.4,-4.4 -7.4,1.4 -8.3,2.3 -8.3,5.4 -8.6,5.7 -10.7,5.7

## Silkscreen, mask and mechanical layers (free items; w line width, h text height)
Top Solder:
  text "TS3" at -3.999,-5.5 h3